# EAGLE board DS2482 1 Wire Controller copy (EAGLE 7.1.0)
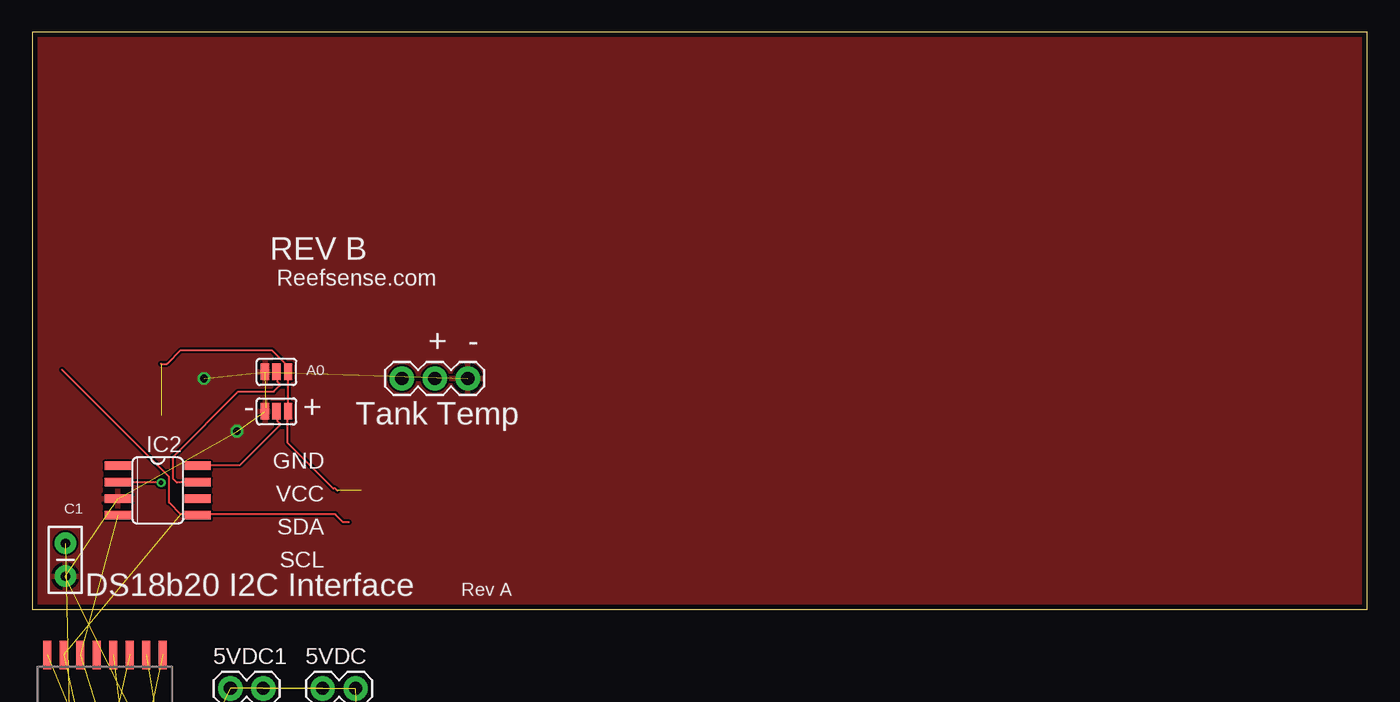
[diagram p0: board, top side]
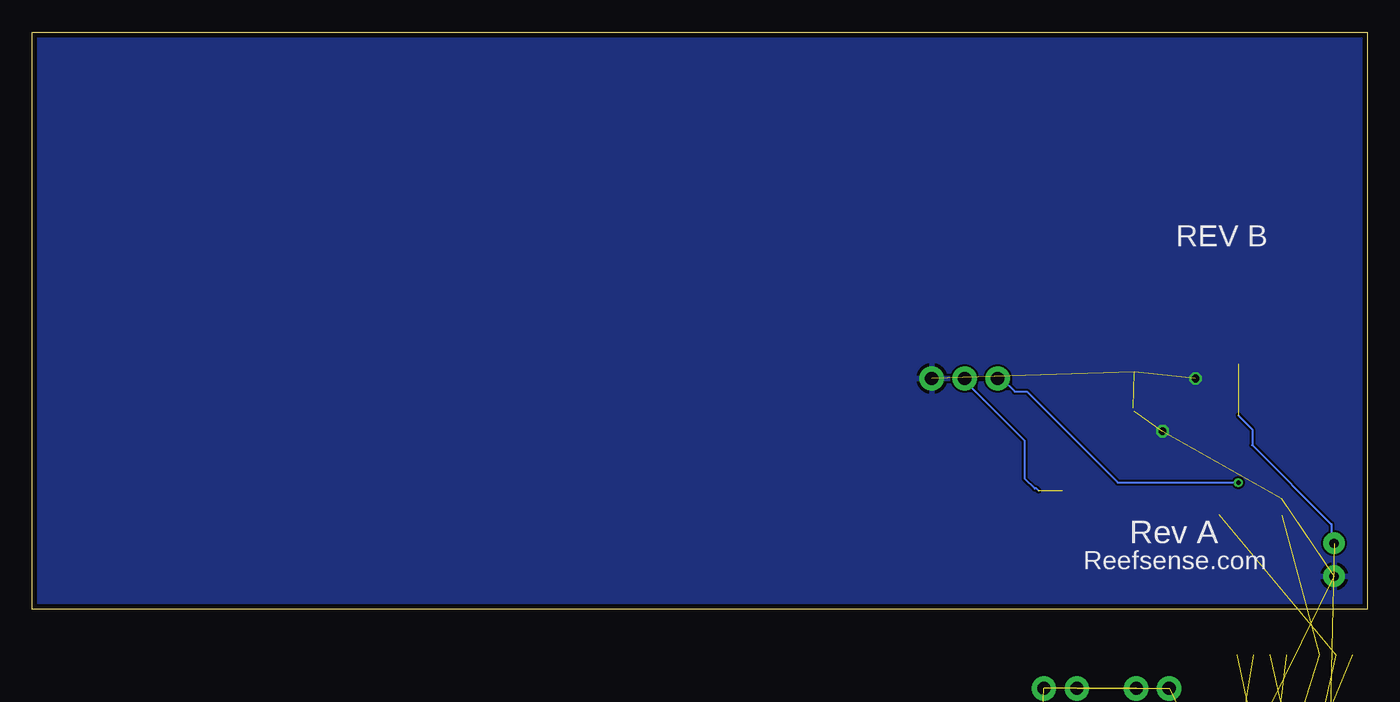
[diagram p1: board, bottom side, seen from below]

Size 102.79 x 44.44 mm. Coordinates in mm from the lower left corner, seen from the top.
Outline: 0,0 102.79,0 102.79,44.44 0,44.44 0,0
Copper layers (1*16): Top 0.0356mm / dielectric 1.5011mm / Bottom 0.0356mm
Design rules "LaenPCBOrder": minimum track width 6mil, minimum drill 13mil, track to track 6mil, track to pad 6mil, pad to pad 6mil, via to via 6mil, smd to smd 6mil, copper to edge 15mil, drill to drill 6mil, minimum pad ring 7mil, minimum via ring 7mil, stop-mask expansion 3mil, vias tented up to drill 0mil, thermal gap 10mil

## Footprints (pad centres in the part's own frame; a part is rotated, then mirrored left to right if it is on the bottom)
1X02 = drill 1.016 pad 1.88: 1 0,0; 2 2.54,0
SJ_3 = smd 0.635 x 1.27: 1 -0.889,0; 2 0,0; 3 0.889,0
CAP-PTH-SMALL2 = drill 0.7 pad 1.651: 1 0,0; 2 2.54,0
SO16W = smd 0.6 x 2.2: 1 -4.445,-4.6; 2 -3.175,-4.6; 3 -1.905,-4.6; 4 -0.635,-4.6; 5 0.635,-4.6; 6 1.905,-4.6; 7 3.175,-4.6; 8 4.445,-4.6; 9 4.445,4.6; 10 3.175,4.6; 11 1.905,4.6; 12 0.635,4.6; 13 -0.635,4.6; 14 -1.905,4.6; 15 -3.175,4.6; 16 -4.445,4.6
SO08 = smd 0.66 x 2.032: 1 -1.905,-3.073; 2 -0.635,-3.073; 3 0.635,-3.073; 4 1.905,-3.073; 5 1.905,3.073; 6 0.635,3.073; 7 -0.635,3.073; 8 -1.905,3.073
1X03 = drill 1.016 pad 1.88: 1 0,0; 2 2.54,0; 3 5.08,0
1X04 = drill 1.016 pad 1.88 square: 1 0,0 | drill 1.016 pad 1.88: 2 2.54,0; 3 5.08,0; 4 7.62,0
LED3MM = drill 0.813 pad 1.88: A -1.27,0; K 1.27,0
AXIAL-0.3 = drill 0.9 pad 1.88: P$1 -3.81,0; P$2 3.81,0

## Placement (x,y rotation side)
5VDC  +  [1X02]  22.35,-6.1 0 top  (outside the outline)
5VDC1  +  [1X02]  15.24,-6.1 0 top  (outside the outline)
A0  [SJ_3]  18.8,18.29 0 top
A1  [SJ_3]  18.8,15.24 0 top
A2  [SJ_3]  16.26,-30.48 0 top  (outside the outline)
A3  [SJ_3]  19.81,-30.48 0 top  (outside the outline)
A4  [SJ_3]  23.37,-30.48 0 top  (outside the outline)
A5  [SJ_3]  26.92,-30.48 0 top  (outside the outline)
A6  [SJ_3]  0.51,-35.05 0 top  (outside the outline)
C1  [CAP-PTH-SMALL2]  2.54,5.08 270 top
C2  [CAP-PTH-SMALL2]  10.16,-31.5 0 top  (outside the outline)
IC1  PCF8574T  [SO16W]  5.59,-8.13 0 top  (outside the outline)
IC2  DS2482-100S  [SO08]  9.65,9.14 270 top
IO-1  [1X03]  22.86,-17.78 0 top  (outside the outline)
IO-2  [1X03]  0.51,-22.86 0 top  (outside the outline)
IO-3  [1X03]  9.14,-22.86 0 top  (outside the outline)
IO-4  [1X03]  17.78,-22.86 0 top  (outside the outline)
JP1  [1X04]  0.51,-17.78 0 top  (outside the outline)
JP3  [1X04]  11.68,-17.78 0 top  (outside the outline)
JP4  [1X03]  28.45,17.78 0 top
LED1  [LED3MM]  1.02,-26.42 0 top  (outside the outline)
LED2  [LED3MM]  10.67,-26.42 0 top  (outside the outline)
LED3  [LED3MM]  20.32,-26.42 0 top  (outside the outline)
LED4  [LED3MM]  1.02,-30.99 0 top  (outside the outline)
R3  2.2k  [AXIAL-0.3]  24.89,-38.1 0 top  (outside the outline)
R4  2.2k  [AXIAL-0.3]  3.56,-41.15 0 top  (outside the outline)
R5  330 ohms  [AXIAL-0.3]  7.11,-35.05 0 top  (outside the outline)
R6  330 ohms  [AXIAL-0.3]  17.78,-35.05 0 top  (outside the outline)
R7  330 ohms  [AXIAL-0.3]  3.56,-38.1 0 top  (outside the outline)
R8  330 ohms  [AXIAL-0.3]  14.22,-38.1 0 top  (outside the outline)

## Library data of the parts
5VDC 5VDC1 IO-1-IO-4 JP1 JP3 JP4 = SparkFun-Connectors
A0 A1-A6 = SparkFun-Retired
C1 C2 = SparkFun-Capacitors
IC1 = micro-philips
IC2 = 1wire
LED1-LED4 = SparkFun-LED
R3-R8 = SparkFun-Resistors

## Nets
5V: A0.3 A1.3 A2.3 A3.3 A4.3 A6.1 C1.1 C2.1 JP1.2 JP3.2 JP4.2 LED1.A LED2.A LED3.A LED4.A R3.P$2 R4.P$2
GND: A0.1 A1.1 A2.1 A3.1 A4.1 A5.3 C1.2 IC1.8 IC2.3 JP1.1 JP3.1 JP4.3
N$1: IC1.14 IC2.4 JP1.4 JP3.4 R4.P$1
N$3: A2.2 IC1.1
N$4: A0.2 IC2.7
N$6: IC1.15 IC2.5 JP1.3 JP3.3 R3.P$1
N$7: A1.2 IC2.8
N$8: C2.2 IC1.16
N$9: A3.2 IC1.2
N$10: A4.2 IC1.3
N$11: IC1.10 R6.P$1
N$12: IC2.2 JP4.1
N$13: IC1.11 R7.P$1
N$14: IC1.12 R8.P$1
N$15: IC1.4 IO-1.1
N$16: IC1.5 IO-2.1
N$17: IC1.6 IO-3.1
N$18: IC1.7 IO-4.1
N$19: IC1.9 R5.P$1
N$20: LED1.K R5.P$2
N$21: LED2.K R6.P$2
N$22: LED3.K R7.P$2
N$23: LED4.K R8.P$2
N$24: A6.2 IO-1.2 IO-2.2 IO-3.2 IO-4.2
N$25: 5VDC1.1 5VDC.1 A6.3
N$26: 5VDC1.2 5VDC.2 A5.1
N$27: A5.2 IO-1.3 IO-2.3 IO-3.3 IO-4.3
VDD: IC2.1

## Tracks (layer width: path | path; a pad name or v marks a point on that pad's centre or on a via)
5V  (15 unrouted)
  Top 0.152: 19.66,18.29 19.66,15.24 | 19.66,15.24 19.66,12.8 23.16,9.3 23.32,9.3 23.47,9.14 | 19.66,15.24 A1.3 | 19.66,18.29 19.66,18.75 18.44,19.96 11.43,19.96 10.36,18.9 9.91,18.9 | 19.66,18.29 A0.3
  Bottom 0.152: 25.3,9.14 25.45,9.3 25.6,9.3 26.36,10.06 26.36,12.95 30.48,17.07 30.48,17.22 30.94,17.68 JP4.2 | 9.91,14.94 8.84,13.87 8.84,12.65 2.74,6.55 2.74,5.94 2.59,5.79 2.59,5.18 C1.1
GND  (via drill 0.6)  (13 unrouted)
  Top 0.152: A1.1 18,15.5 17.91,15.5
  other vias: 15.75,13.72 13.21,17.78
  pour Top: -1.02,47.24 104.14,46.74 103.63,-2.03 -1.02,-1.02
  pour Bottom: -1.02,-1.02 104.14,-1.52 104.14,47.75 -1.02,47.24
N$1  (4 unrouted)
N$3  (1 unrouted)
N$4
  Top 0.152: A0.2 18.9,18.29 18.9,17.53 19.05,17.37 19.05,17.22 18.59,16.76 15.85,16.76 10.82,11.73 10.82,10.06 11.12,9.75 12.65,9.75 IC2.7
N$6  (4 unrouted)
  Top 0.152: 24.38,6.71 23.93,6.71 23.32,7.32 12.8,7.32 IC2.5 12.65,7.32 11.43,7.32 10.52,8.23 10.52,10.21 2.29,18.44
N$7
  Top 0.152: A1.2 18.9,15.24 18.9,14.48 19.05,14.33 19.05,14.17 16,11.12 12.8,11.12 IC2.8
N$8  (1 unrouted)
N$9  (1 unrouted)
N$10  (1 unrouted)
N$11  (1 unrouted)
N$12  (via drill 0.33)
  Top 0.152: v9.91,9.75 6.71,9.75 IC2.2
  Bottom 0.152: v9.91,9.75 19.2,9.75 26.21,16.76 27.13,16.76 28.04,17.68 28.35,17.68 JP4.1
N$13  (1 unrouted)
N$14  (1 unrouted)
N$15  (1 unrouted)
N$16  (1 unrouted)
N$17  (1 unrouted)
N$18  (1 unrouted)
N$19  (1 unrouted)
N$20  (1 unrouted)
N$21  (1 unrouted)
N$22  (1 unrouted)
N$23  (1 unrouted)
N$24  (4 unrouted)
N$25  (2 unrouted)
N$26  (2 unrouted)
N$27  (4 unrouted)

## Text on the board
tNames: REV B | Reefsense.com | + | - | - | + | Tank Temp | GND | VCC | SDA | SCL | DS18b20 I2C Interface | Rev A
bNames: REV B | Rev A | Reefsense.com